# Altium PCB busanaliz2.PcbDoc (part 2 of 2)
Units mm, origin at the board's own origin, x right, y up, seen from the top; angles counter-clockwise.
Board outline 118.11 x 70.87 mm, 4 copper layers (Component Side, Ground Plane, Power Plane, Solder Side), stack 0.43 mm thick; 98 components, 84 nets, 533 pads, 170 vias.
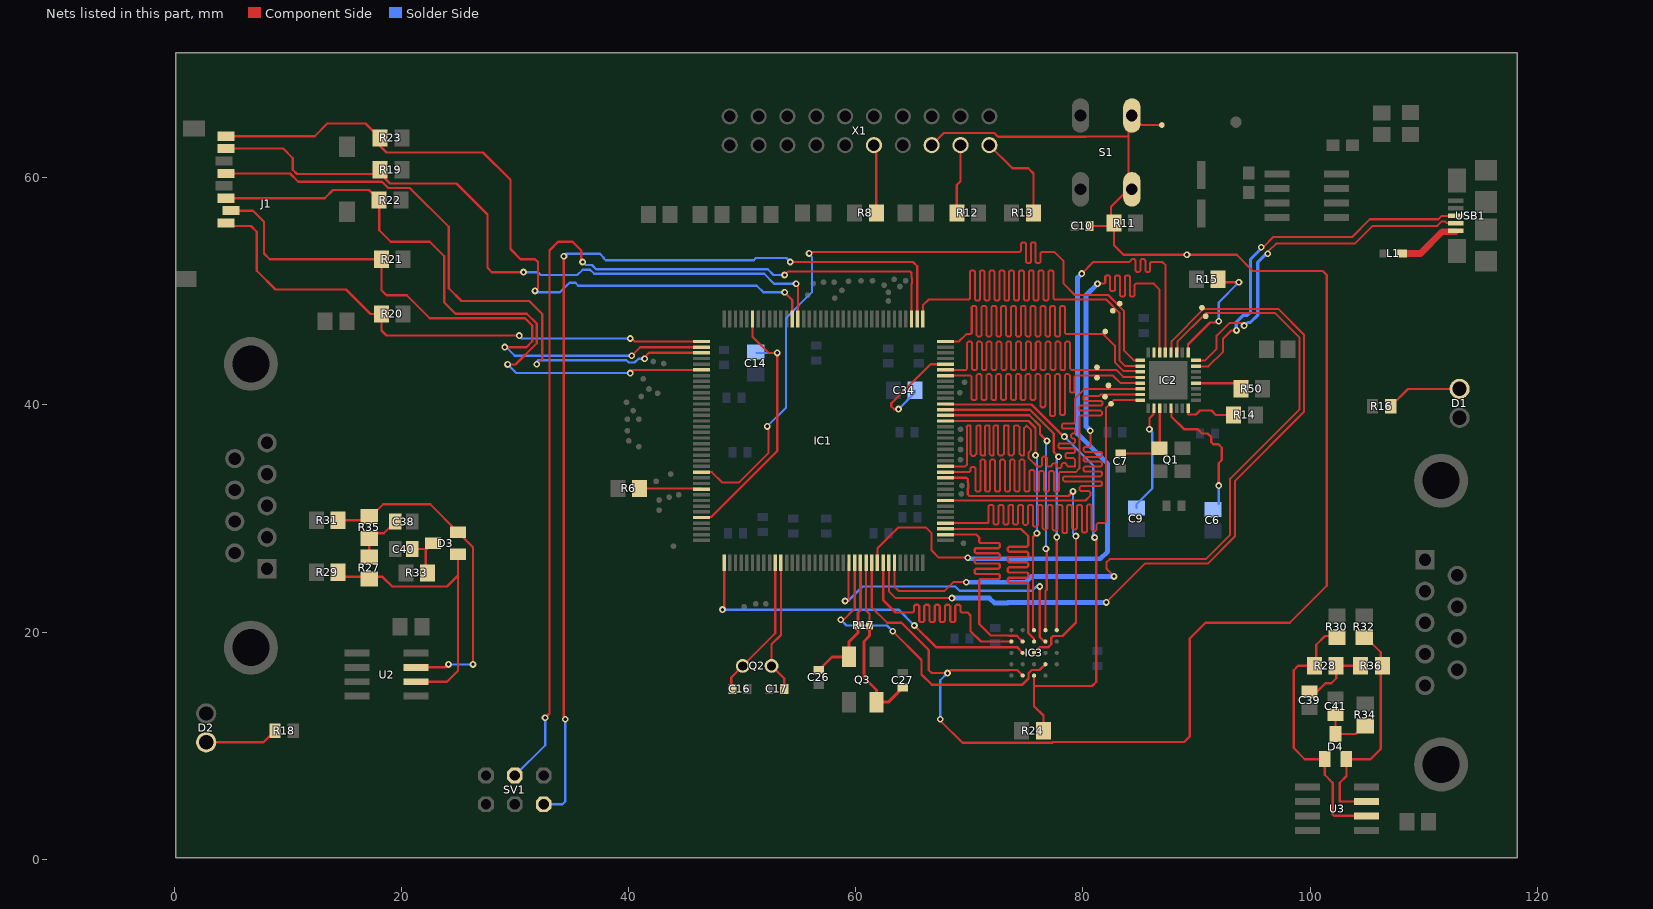
[diagram p4: the nets of this part, all layers, seen from the top]

## Via types
v1: diameter 0.6, hole 0.3, Component Side to Solder Side, 170 vias

## Nets (pads, with @x,y where several pads share a name; then routed paths per layer and width w, separated by ;. In a path a pad name is that pad's centre, name@x,y a point inside that pad or via, vN(x,y) a via of type N, cw(c..) or ccw(c..) an arc to the next point about the centre after c; other vN are vias at no path point) (continued)
NetC6_1: C6.1 IC2.29 | length 11.6
  Component Side w0.2: IC2.29@87.753,39.714 87.803,39.664 87.803,38.948 88.886,37.865 90.082,37.865 90.463,37.484 90.971,37.484 91.292,37.162 91.292,36.706 91.468,36.53 91.925,36.53 92.221,36.234 92.221,35.14 91.948,34.867 v1(91.948,32.893)
  Solder Side w0.2: C6.1@91.948,31.303 v1(91.948,32.893)
NetC7_2: C7.2 IC2.27 Q1.1 | length 7.1
  Component Side w0.2: C7.2@83.312,35.712 86.143,35.712 86.753,36.322 IC2.27@86.753,39.714
NetC9_1: C9.1 IC2.26 | length 9.6
  Component Side w0.2: v1(85.852,37.846) 85.852,38.814 86.203,39.165 IC2.26@86.203,39.664
  Solder Side w0.2: C9.1@84.709,30.922 84.709,31.242 86.106,32.639 86.106,37.592 v1(85.852,37.846)
NetC16_2: C16.2 IC1.10 Q2.2 | length 12.8
  Component Side w0.2: C16.2@49.124,14.986 49.022,15.088 49.022,16.002 Q2.2@50.038,17.018 52.9,19.88 IC1.10@52.9,26.092
NetC17_2: C17.2 IC1.11 Q2.1 | length 11.9
  Component Side w0.2: IC1.11@53.4,26.092 53.4,19.745 52.578,18.923 Q2.1@52.578,17.018 53.695,15.901 C17.2@53.695,14.986
NetC26_1: C26.1 IC1.25 Q3.P$1 R17.2 | length 11.8
  Component Side w0.254: C26.1@56.743,16.652 57.899,17.808 Q3.P$1@59.411,17.808 59.411,19.152 60.198,19.939 R17.2@60.198,20.574 60.198,21.717 60.4,21.919 IC1.25@60.4,26.092
NetC27_1: C27.1 IC1.26 Q3.P$3 R17.1 | length 15.9
  Component Side w0.2: IC1.26@60.9,26.092 60.9,21.904 61.206,21.598 R17.1@61.206,20.574
  Component Side w0.254: R17.1@61.206,20.574 61.206,19.677 60.706,19.177 60.706,16.002 61.824,14.884 Q3.P$3@61.824,13.821 62.858,13.821 C27.1@64.135,15.098
NetC34_1: C34.1 IC1.68 | length 9.4
  Component Side w0.2: v1(63.754,39.624) 63.373,39.624 63.119,39.878 63.119,40.132 66.567,43.58 IC1.68@67.888,43.58
  Solder Side w0.2: v1(63.754,39.624) 65.212,41.082 C34.1@65.212,41.275
NetC38_1: C38.1 R27.1 R35.2 | length 4.7
  Component Side w0.2: R27.1@17.145,26.454 R27.1@17.145,26.604 R35.2@17.145,28.245 17.602,28.702 18.427,28.702 C38.1@19.443,29.718
NetC39_1: C39.1 R28.1 R36.2 | length 6.2
  Component Side w0.2: C39.1@99.949,14.72 100.572,14.72 101.346,15.494 101.854,15.494 102.296,15.936 R28.1@102.296,17.018 R36.2@104.445,17.018 R36.2@104.61,17.018
NetC40_1: C40.1 D3.3 R33.2 | length 3.9
  Component Side w0.2: C40.1@20.543,27.305 22.25,27.305 22.136,27.191 R33.2@22.136,25.199
NetC41_1: C41.1 D4.3 R34.2 | length 4.7
  Component Side w0.2: C41.1@102.235,12.712 D4.3@102.235,11.024 103.988,11.024 R34.2@104.864,11.9
NetD1_1: D1.1 R16.2 | length 6.7
  Component Side w0.2: R16.2@107.099,39.878 108.623,41.402 D1.1@113.157,41.402
NetD2_1: D2.1 R18.2 | length 6.5
  Component Side w0.2: D2.1@2.794,10.287 7.836,10.287 R18.2@8.852,11.303
NetD3_1: D3.1 R27.2 R29.1 U2.6 | length 26
  Component Side w0.2: R29.1@14.262,25.273 14.262,25.235 14.643,24.854 17.145,24.854 18.326,24.854 19.177,24.003 24.003,24.003 24.976,24.976 ; U2.6@21.285,15.621 24.003,15.621 24.976,16.594 24.976,24.976 ; D3.1@24.976,26.863 24.976,24.976
NetD3_2: D3.2 R31.1 R35.1 U2.7 | length 29.6
  Component Side w0.2: R31.1@14.262,29.845 R31.1@14.412,29.845 16.98,29.845 18.377,31.242 22.512,31.242 D3.2@24.976,28.778 26.289,27.465 v1(26.289,17.145) ; U2.7@21.285,16.891 23.876,16.891 v1(24.13,17.145)
  Solder Side w0.2: v1(24.13,17.145) v1(26.289,17.145)
NetD4_1: D4.1 R28.2 R30.1 U3.6 | length 24.3
  Component Side w0.2: R28.2@100.381,17.018 98.933,17.018 98.552,16.637 98.552,9.779 99.525,8.806 D4.1@101.285,8.806 101.285,7.427 101.981,6.731 101.981,3.937 102.108,3.81 U3.6@104.978,3.81 ; R28.2@100.546,17.018 100.546,18.885 101.308,19.647 102.362,19.647 R30.1@102.362,19.558
NetD4_2: D4.2 R32.1 R36.1 U3.7 | length 20.3
  Component Side w0.2: R32.1@104.775,19.647 106.21,18.212 106.21,9.69 105.326,8.806 D4.2@103.2,8.806 103.2,7.315 102.616,6.731 102.616,5.08 U3.7@104.978,5.08
NetIC1_135: IC1.135 R6.2 | length 5.5
  Component Side w0.2: R6.2@40.97,32.639 45.541,32.639 45.55,32.63 46.362,32.63 IC1.135@46.412,32.58
NetIC2_4: IC2.4 R50.2 | length 3.4
  Component Side w0.2: IC2.4@89.953,41.914 R50.2@93.392,41.914
NetIC2_9: IC2.9 R15.2 | length 10.4
  Component Side w0.2: IC2.9@89.253,44.614 89.253,45.311 91.186,47.244 91.948,47.244 v1(91.948,47.371) ; R15.2@91.897,51.054 92.151,50.8 v1(93.726,50.8)
  Solder Side w0.2: v1(91.948,47.371) 91.948,49.022 v1(93.726,50.8)
NetIC2_32: IC2.32 R14.2 | length 4.9
  Component Side w0.2: IC2.32@89.253,39.714 89.253,39.144 89.944,39.144 90.297,39.497 91.313,39.497 91.694,39.116 R14.2@93.269,39.116
NetL1_1: L1.1 USB1.V | length 5.5
  Component Side w0.6: L1.1@108.09,53.34 109.728,53.34 111.633,55.245 USB1.V@112.821,55.245
NetR8_2: R8.2 X1.11 | length 6.1
  Component Side w0.2: X1.11@61.595,62.865 61.798,62.662 R8.2@61.798,56.896
NetR12_2: R12.2 X1.17 | length 6.1
  Component Side w0.2: R12.2@68.885,56.896 68.885,59.36 69.215,59.69 X1.17@69.215,62.865
NetR13_2: R13.2 X1.19 | length 8.4
  Component Side w0.2: X1.19@71.755,62.865 73.787,60.833 75.184,60.833 75.641,60.376 R13.2@75.641,56.896
OCTO_CLK: IC1.24 IC3.B2 | length 27.9
  Component Side w0.2: v1(58.674,21.082) 58.801,20.955 59.909,22.063 59.909,26.083 IC1.24@59.9,26.092 ; v1(63.246,20.066) 65.786,17.526 65.786,16.256 66.675,15.367 74.676,15.367 75.207,15.898 75.207,16.362 75.491,16.646 76.177,16.646 IC3.B2@76.692,17.161
  Solder Side w0.2: v1(58.674,21.082) 59.182,20.574 62.738,20.574 v1(63.246,20.066)
OCTO_DQS: IC1.48 IC3.C3 | length 29.3
  Component Side w0.2: IC1.48@67.888,33.58 69.733,33.58 69.85,33.463 69.85,33.163 69.892,33.121 69.892,32.665 69.85,32.623 69.85,32.131 70.001,31.98 78.716,31.98 v1(79.121,32.385) ; IC3.C3@75.692,18.161 76.2,18.669 76.962,18.669 77.207,18.914 77.207,19.498 77.355,19.646 78.193,19.646 79.375,20.828 v1(79.375,28.448)
  Solder Side w0.2: 79.121,28.702 v1(79.121,32.385)
OCTO_IO0: IC1.39 IC3.D3 | length 30.4
  Component Side w0.2: IC1.39@67.888,29.08 74.552,29.08 75.184,28.448 75.184,28.194 75.184,27.967 75.184,27.627 75.071,27.513 73.493,27.513 73.379,27.4 73.379,27.173 73.493,27.059 75.071,27.059 75.184,26.946 75.184,26.719 75.071,26.605 73.493,26.605 73.379,26.492 73.379,26.265 73.493,26.151 75.071,26.151 75.184,26.038 75.184,25.811 75.071,25.697 73.493,25.697 73.379,25.584 73.379,25.357 73.493,25.243 75.071,25.243 75.184,25.13 75.184,24.903 75.071,24.789 73.493,24.789 73.379,24.676 73.379,24.449 73.493,24.335 75.071,24.335 75.184,24.222 75.184,23.881 75.184,23.495 75.184,19.921 75.692,19.413 IC3.D3@75.692,19.161
OCTO_IO1: IC1.23 IC3.D2 | length 26.7
  Component Side w0.2: v1(59.055,22.733) 59.309,22.733 59.35,22.774 IC1.23@59.35,26.042 ; v1(76.2,24.003) 76.2,19.558 76.597,19.161 IC3.D2@76.692,19.161
  Solder Side w0.2: v1(59.055,22.733) 59.309,22.733 60.579,24.003 68.747,24.003 69.128,23.622 75.536,23.622 75.917,24.003 v1(76.2,24.003)
OCTO_IO2: IC1.1 IC3.C4 | length 32.1
  Component Side w0.2: v1@48.4,21.971 IC1.1@48.4,26.092 ; v1(65.151,20.574) 67.056,18.669 74.184,18.669 IC3.C4@74.692,18.161
  Solder Side w0.2: v1(48.26,21.971) 63.754,21.971 v1(65.151,20.574)
OCTO_IO3: IC1.38 IC3.D4 | length 31
  Component Side w0.2: IC1.38@67.888,28.58 70.607,28.58 70.866,28.321 70.866,28.067 70.866,27.953 70.979,27.84 72.557,27.84 72.671,27.726 72.671,27.499 72.557,27.386 70.866,27.386 70.572,27.386 70.458,27.272 70.458,27.045 70.572,26.932 70.866,26.932 72.557,26.932 72.671,26.818 72.671,26.591 72.557,26.478 70.866,26.478 70.572,26.478 70.458,26.364 70.458,26.137 70.572,26.024 70.866,26.024 72.557,26.024 72.671,25.91 72.671,25.683 72.557,25.57 70.866,25.57 70.572,25.57 70.458,25.456 70.458,25.229 70.572,25.116 70.866,25.116 72.557,25.116 72.671,25.003 72.671,24.776 72.557,24.662 70.979,24.662 70.866,24.549 70.866,24.208 70.866,24.13 70.866,20.701 71.882,19.685 73.482,19.685 73.491,19.676 74.177,19.676 IC3.D4@74.692,19.161
OCTO_IO4: IC1.29 IC3.D5 | length 29.1
  Component Side w0.2: IC1.29@62.4,26.092 62.4,22.817 63.5,21.717 64.897,21.717 65.01,21.717 65.124,21.83 65.124,22.292 65.237,22.406 65.464,22.406 65.578,22.292 65.578,21.717 65.578,20.999 65.691,20.885 65.918,20.885 66.032,20.999 66.032,21.717 66.032,22.292 66.145,22.406 66.372,22.406 66.486,22.292 66.486,21.717 66.486,20.999 66.599,20.885 66.826,20.885 66.94,20.999 66.94,21.717 66.94,22.292 67.053,22.406 67.28,22.406 67.394,22.292 67.394,21.717 67.394,20.999 67.507,20.885 67.734,20.885 67.848,20.999 67.848,21.717 67.848,22.292 67.961,22.406 68.188,22.406 68.302,22.292 68.302,21.717 68.302,20.999 68.415,20.885 68.642,20.885 68.756,20.999 68.756,21.717 68.756,22.292 68.869,22.406 69.096,22.406 69.21,22.292 69.21,21.83 69.323,21.717 69.596,21.717 69.85,21.717 70.104,21.463 70.104,20.066 71.009,19.161 IC3.D5@73.692,19.161
OCTO_IO5: IC1.58 IC3.E3 | length 26.5
  Component Side w0.2: IC1.58@67.888,38.58 75.212,38.58 75.819,37.973 v1(75.819,35.56) ; IC3.E3@75.692,20.161 75.6,20.253 75.6,28.356 v1(75.946,28.702)
  Solder Side w0.2: v1(75.819,35.56) 75.946,35.687 v1(75.946,28.702)
OCTO_IO6: IC1.59 IC3.E2 | length 27.1
  Component Side w0.2: IC1.59@67.888,39.08 75.278,39.08 76.219,38.139 76.219,37.446 v1(76.835,36.83) ; IC3.E2@76.692,20.161 76.692,23.622 76.8,23.73 76.8,27.264 v1(76.733,27.33)
  Solder Side w0.2: v1(76.733,27.33) 76.733,36.62 76.835,36.722 v1(76.835,36.83)
OCTO_IO7: IC1.60 IC3.E1 | length 28.2
  Component Side w0.2: IC1.60@67.888,39.58 75.343,39.58 77.435,37.488 77.435,35.849 v1(77.851,35.433) ; IC3.E1@77.692,20.161 v1(77.692,28.353)
  Solder Side w0.2: v1(77.692,28.353) 77.692,35.147 77.978,35.433 v1(77.851,35.433)
OCTO_NCS: IC1.61 IC3.A3 R24.1 | length 45.3
  Component Side w0.2: IC1.61@67.888,40.08 67.938,40.03 75.459,40.03 78.151,37.338 78.359,37.338 v1(78.359,37.211) ; IC3.A3@75.692,16.161 75.692,15.24 ; R24.1@76.515,11.303 76.515,12.639 75.692,13.462 75.692,15.24 ; v1(81.026,28.321) 81.172,28.175 81.172,15.621 80.791,15.24 75.692,15.24
  Solder Side w0.2: v1(78.359,37.211) 80.899,34.671 80.899,28.448 v1(81.026,28.321)
RESET: C10.1 IC1.27 IC3.A4 pad.68 R11.2 S1.3 S1.4 X1.15 | length 153.5
  Component Side w0.2: IC1.27@61.4,26.092 61.4,22.166 62.757,20.809 64.027,20.809 66.421,18.415 66.421,16.637 66.675,16.383 v1(68.072,16.383) 68.326,16.637 73.482,16.637 73.491,16.646 74.207,16.646 IC3.A4@74.692,16.161 ; X1.15@66.675,62.865 67.74,63.93 72.196,63.93 72.523,63.603 80.244,63.603 80.267,63.627 83.998,63.627 ; v1(67.437,12.319) 67.437,12.192 69.388,10.241 77.3,10.241 77.365,10.306 88.919,10.306 89.408,10.795 89.408,19.431 90.786,20.809 98.21,20.809 101.473,24.072 101.473,51.435 101.111,51.797 94.957,51.797 93.541,53.213 v1(89.154,53.213) 83.566,53.213 82.728,54.051 R11.2@82.728,56.007 ; C10.1@80.584,55.753 82.474,55.753 82.474,57.455 83.998,58.979 83.998,63.627 ; pad.68@86.944,64.643 85.141,64.643 S1.4@84.303,65.481 83.998,65.176 83.998,63.627
  Solder Side w0.2: v1(67.437,12.319) 67.437,15.748 v1(68.072,16.383)
SD_CLK: IC1.111 J1.5 | length 56.1
  Component Side w0.2: J1.5@4.552,60.382 10.173,60.382 10.91,59.644 18.276,59.644 18.819,59.101 20.728,59.101 24.149,55.68 24.149,50.273 25.273,49.149 31.242,49.149 32.385,48.006 32.385,44.069 v1(31.896,43.58) ; v1(41.402,44.069) 41.402,44.196 41.786,44.58 IC1.111@46.412,44.58
  Solder Side w0.2: v1(31.896,43.58) 31.896,43.815 32.004,43.923 39.81,43.923 40.01,43.723 40.508,43.723 40.854,44.069 v1(41.402,44.069)
SD_CMD: IC1.114 J1.3 R22.1 | length 59
  Component Side w0.2: J1.3@4.552,58.197 13.239,58.197 13.97,58.928 17.14,58.928 R22.1@18.029,58.039 18.029,55.377 19.05,54.356 22.479,54.356 23.749,53.086 23.749,49.022 24.746,48.025 31.027,48.025 31.896,47.156 31.896,45.427 30.03,43.561 v1(29.337,43.561) ; v1(40.132,42.799) 40.413,43.08 IC1.114@46.412,43.08
  Solder Side w0.2: v1(29.337,43.561) 30.099,42.799 v1(40.132,42.799)
SD_D0: IC1.95 J1.7 R19.1 | length 62.3
  Component Side w0.2: J1.7@4.552,62.566 9.57,62.566 10.414,61.722 10.414,60.706 10.795,60.325 18.161,60.325 18.985,59.501 24.827,59.501 27.559,56.769 27.559,52.07 27.94,51.689 v1(30.734,51.689) ; v1(54.737,50.673) 54.737,50.8 54.9,50.637 IC1.95@54.9,47.568
  Solder Side w0.2: v1(30.734,51.689) 32.004,51.689 32.258,51.435 35.473,51.435 35.946,51.908 36.594,51.908 36.962,51.54 51.925,51.54 52.792,50.673 v1(54.737,50.673)
SD_D1: IC1.96 J1.8 R23.1 | length 64.9
  Component Side w0.2: J1.8@4.552,63.658 12.35,63.658 13.462,64.77 16.83,64.77 R23.1@18.1,63.5 18.1,62.799 18.669,62.23 27.178,62.23 29.591,59.817 29.591,53.721 30.48,52.832 31.75,52.832 32.004,52.578 32.004,50.292 v1(31.75,50.038) ; v1(53.721,49.911) 54.4,49.232 IC1.96@54.4,47.568
  Solder Side w0.2: v1(31.75,50.038) 31.877,49.911 33.949,49.911 34.803,50.765 35.301,50.765 35.566,50.5 51.267,50.5 51.856,49.911 v1(53.721,49.911)
SD_D2: IC1.109 J1.1 R20.1 | length 49.2
  Component Side w0.2: J1.1@4.552,56.013 4.812,55.753 6.731,55.753 7.239,55.245 7.239,51.816 8.89,50.165 15.113,50.165 17.272,48.006 R20.1@18.227,48.006 18.227,46.543 18.669,46.101 v1(30.353,46.101) ; v1(40.132,45.847) 40.132,45.974 40.526,45.58 IC1.109@46.412,45.58
  Solder Side w0.2: v1(30.353,46.101) 30.607,45.847 v1(40.132,45.847)
SD_D3: IC1.110 J1.2 R21.1 | length 55.9
  Component Side w0.2: J1.2@4.959,57.105 6.903,57.105 7.874,56.134 7.874,53.34 8.382,52.832 R21.1@18.227,52.832 18.227,50.099 18.669,49.657 20.447,49.657 22.479,47.625 30.861,47.625 31.496,46.99 31.496,45.593 30.988,45.085 v1(29.083,45.085) ; v1(40.259,44.323) 41.016,45.08 IC1.110@46.412,45.08
  Solder Side w0.2: v1(29.083,45.085) 29.21,45.085 29.972,44.323 v1(40.259,44.323)
ULPI_CK: IC1.44 IC2.14 | length 70.5
  Component Side w0.177: IC1.44@67.888,31.58 80.221,31.58 80.645,32.004 80.645,32.207 ; 80.645,36.779 v1(80.645,37.719) 80.645,37.084 ; v1(81.28,50.673) 81.763,50.673 ; 85.573,50.673 86.233,50.673 86.753,50.153 IC2.14@86.753,44.614
  Component Side w0.178: 80.645,32.207 80.645,32.296 80.537,32.404 79.818,32.404 79.71,32.512 79.71,32.728 79.818,32.836 81.556,32.836 81.664,32.944 81.664,33.16 81.556,33.268 78.36,33.268 78.252,33.376 78.252,33.592 78.36,33.7 81.556,33.7 81.664,33.808 81.664,34.024 81.556,34.132 80.17,34.132 80.062,34.24 80.062,34.456 80.17,34.564 81.556,34.564 81.664,34.672 81.664,34.888 81.556,34.996 80.17,34.996 80.062,35.104 80.062,35.32 80.17,35.428 81.556,35.428 81.664,35.536 81.664,35.752 81.556,35.86 80.17,35.86 80.062,35.968 80.062,36.184 80.17,36.292 80.537,36.292 80.645,36.4 80.645,36.779 ; 81.763,50.673 81.852,50.673 81.96,50.781 81.96,51.299 82.068,51.407 82.284,51.407 82.392,51.299 82.392,50.114 82.5,50.006 82.716,50.006 82.824,50.114 82.824,51.299 82.932,51.407 83.148,51.407 83.256,51.299 83.256,49.642 83.364,49.534 83.58,49.534 83.688,49.642 83.688,51.299 83.796,51.407 84.012,51.407 84.12,51.299 84.12,49.642 84.228,49.534 84.444,49.534 84.552,49.642 84.552,50.565 84.66,50.673 85.573,50.673
  Solder Side w0.423: v1(80.645,37.719) 80.264,38.1 80.264,49.657 v1(81.28,50.673)
ULPI_D0: IC1.40 IC2.24 pad.69@82.471,40.086 | length 70.1
  Component Side w0.177: IC1.40@67.888,29.58 71.501,29.58 ; 81.783,29.58 81.904,29.58 82.042,29.718 82.042,39.751 82.705,40.414 IC2.24@85.053,40.414
  Component Side w0.178: 71.501,29.58 71.59,29.58 71.698,29.688 71.698,31.094 71.806,31.202 72.022,31.202 72.13,31.094 72.13,29.577 72.238,29.469 72.454,29.469 72.562,29.577 72.562,31.094 72.67,31.202 72.886,31.202 72.994,31.094 72.994,29.577 73.102,29.469 73.318,29.469 73.426,29.577 73.426,31.094 73.534,31.202 73.75,31.202 73.858,31.094 73.858,29.577 73.966,29.469 74.182,29.469 74.29,29.577 74.29,31.094 74.398,31.202 74.614,31.202 74.722,31.094 74.722,29.538 74.83,29.43 75.046,29.43 75.154,29.538 75.154,31.094 75.262,31.202 75.478,31.202 75.586,31.094 75.586,29.399 75.694,29.291 75.91,29.291 76.018,29.399 76.018,31.094 76.126,31.202 76.342,31.202 76.45,31.094 76.45,29.139 76.558,29.031 76.774,29.031 76.882,29.139 76.882,31.094 76.99,31.202 77.206,31.202 77.314,31.094 77.314,29.05 77.422,28.942 77.638,28.942 77.746,29.05 77.746,31.094 77.854,31.202 78.07,31.202 78.178,31.094 78.178,28.808 78.286,28.7 78.502,28.7 78.61,28.808 78.61,31.094 78.718,31.202 78.934,31.202 79.042,31.094 79.042,29.145 79.15,29.037 79.366,29.037 79.474,29.145 79.474,31.094 79.582,31.202 79.798,31.202 79.906,31.094 79.906,28.858 80.014,28.75 80.23,28.75 80.338,28.858 80.338,31.113 80.446,31.221 80.662,31.221 80.77,31.113 80.77,29.018 80.878,28.91 81.094,28.91 81.202,29.018 81.202,29.472 81.31,29.58 81.783,29.58
ULPI_D1: IC1.49 IC2.23 pad.69@81.94,40.716 | length 71.6
  Component Side w0.177: IC1.49@67.888,34.08 69.901,34.08 ; 78.765,34.08 79.35,34.08 79.684,34.414 79.684,38.436 ; 81.531,40.891 81.554,40.914 IC2.23@85.053,40.914
  Component Side w0.178: 69.901,34.08 69.99,34.08 70.098,34.188 70.098,34.426 70.206,34.534 70.422,34.534 70.53,34.426 70.53,32.477 70.638,32.369 70.854,32.369 70.962,32.477 70.962,35.074 71.07,35.182 71.286,35.182 71.394,35.074 71.394,32.477 71.502,32.369 71.718,32.369 71.826,32.477 71.826,35.074 71.934,35.182 72.15,35.182 72.258,35.074 72.258,32.477 72.366,32.369 72.582,32.369 72.69,32.477 72.69,35.074 72.798,35.182 73.014,35.182 73.122,35.074 73.122,32.477 73.23,32.369 73.446,32.369 73.554,32.477 73.554,35.074 73.662,35.182 73.878,35.182 73.986,35.074 73.986,32.477 74.094,32.369 74.31,32.369 74.418,32.477 74.418,35.074 74.526,35.182 74.742,35.182 74.85,35.074 74.85,32.477 74.958,32.369 75.174,32.369 75.282,32.477 75.282,34.177 75.39,34.285 75.606,34.285 75.714,34.177 75.714,32.477 75.822,32.369 76.038,32.369 76.146,32.477 76.146,34.083 76.254,34.191 76.47,34.191 76.578,34.083 76.578,32.477 76.686,32.369 76.902,32.369 77.01,32.477 77.01,34.083 77.118,34.191 77.334,34.191 77.442,34.083 77.442,32.477 77.55,32.369 77.766,32.369 77.874,32.477 77.874,33.972 77.982,34.08 78.765,34.08 ; 79.684,38.436 79.684,38.957 79.792,39.065 81.556,39.065 81.664,39.173 81.664,39.389 81.556,39.497 79.77,39.497 79.662,39.605 79.662,39.821 79.77,39.929 81.6,39.929 81.708,40.037 81.708,40.253 81.6,40.361 80.17,40.361 80.062,40.469 80.062,40.685 80.17,40.793 81.433,40.793 81.531,40.891
ULPI_D2: IC1.50 IC2.22 pad.69@82.245,41.707 | length 69.7
  Component Side w0.177: IC1.50@67.888,34.58 69.632,34.58 69.765,34.713 69.765,38.003 69.764,38.004 69.764,38.094 69.85,38.18 70.104,38.18 70.104,35.646 70.231,35.519 70.444,35.519 70.612,35.687 70.612,38.1 70.692,38.18 70.993,38.18 70.993,35.646 71.079,35.56 71.374,35.56 71.374,38.1 71.454,38.18 71.755,38.18 71.755,35.687 71.882,35.56 72.136,35.56 72.136,38.1 72.216,38.18 72.517,38.18 72.517,35.687 72.644,35.56 72.898,35.56 73.025,35.687 73.025,38.1 73.105,38.18 73.453,38.18 73.453,35.64 73.533,35.56 73.787,35.56 73.914,35.687 73.914,38.1 73.994,38.18 74.295,38.18 74.422,38.053 74.422,35.687 74.549,35.56 74.803,35.56 74.803,37.937 75.046,38.18 75.419,37.807 75.419,36.009 75.219,35.809 75.219,35.311 75.95,34.58 76.2,34.58 ; 79.07,34.58 79.284,34.58 79.284,35.119 ; 79.284,38.989 79.284,40.549 80.149,41.414 IC2.22@85.053,41.414
  Component Side w0.178: 76.2,34.58 76.289,34.58 76.397,34.688 76.397,35.328 76.505,35.436 76.721,35.436 76.829,35.328 76.829,34.677 76.937,34.569 77.153,34.569 77.261,34.677 77.261,34.736 77.369,34.844 77.585,34.844 77.693,34.736 77.693,34.566 77.801,34.458 78.017,34.458 78.125,34.566 78.125,34.766 78.233,34.874 78.449,34.874 78.557,34.766 78.557,34.688 78.665,34.58 79.07,34.58 ; 79.284,35.119 79.284,35.208 79.176,35.316 78.548,35.316 78.44,35.424 78.44,35.64 78.548,35.748 79.198,35.748 79.306,35.856 79.306,36.072 79.198,36.18 77.932,36.18 77.824,36.288 77.824,36.504 77.932,36.612 79.198,36.612 79.306,36.72 79.306,36.936 79.198,37.044 79.056,37.044 78.948,37.152 78.948,37.368 79.056,37.476 79.198,37.476 79.306,37.584 79.306,37.8 79.198,37.908 78.239,37.908 78.131,38.016 78.131,38.232 78.239,38.34 79.176,38.34 79.284,38.448 79.284,38.989
ULPI_D3: IC1.66 IC2.21 pad.69@81.229,42.393 | length 70
  Component Side w0.177: IC1.66@67.888,42.58 69.571,42.58 ; 79.527,42.58 82.642,42.58 83.308,41.914 IC2.21@85.053,41.914
  Component Side w0.178: 69.571,42.58 70.092,42.58 70.2,42.472 70.2,40.527 70.308,40.419 70.524,40.419 70.632,40.527 70.632,42.592 70.74,42.7 70.956,42.7 71.064,42.592 71.064,40.527 71.172,40.419 71.388,40.419 71.496,40.527 71.496,42.592 71.604,42.7 71.82,42.7 71.928,42.592 71.928,40.527 72.036,40.419 72.252,40.419 72.36,40.527 72.36,42.592 72.468,42.7 72.684,42.7 72.792,42.592 72.792,40.527 72.9,40.419 73.116,40.419 73.224,40.527 73.224,42.592 73.332,42.7 73.548,42.7 73.656,42.592 73.656,40.527 73.764,40.419 73.98,40.419 74.088,40.527 74.088,42.592 74.196,42.7 74.412,42.7 74.52,42.592 74.52,40.527 74.628,40.419 74.844,40.419 74.952,40.527 74.952,42.592 75.06,42.7 75.276,42.7 75.384,42.592 75.384,40.527 75.492,40.419 75.708,40.419 75.816,40.527 75.816,42.592 75.924,42.7 76.14,42.7 76.248,42.592 76.248,39.9 76.356,39.792 76.572,39.792 76.68,39.9 76.68,42.592 76.788,42.7 77.004,42.7 77.112,42.592 77.112,39.114 77.22,39.006 77.436,39.006 77.544,39.114 77.544,42.592 77.652,42.7 77.868,42.7 77.976,42.592 77.976,39.208 78.084,39.1 78.3,39.1 78.408,39.208 78.408,42.592 78.516,42.7 78.732,42.7 78.84,42.592 78.84,41.179 78.948,41.071 79.164,41.071 79.272,41.179 79.272,42.472 79.38,42.58 79.527,42.58
ULPI_D4: IC1.67 IC2.20 pad.69@81.229,43.307 | length 69.7
  Component Side w0.177: IC1.67@67.888,43.08 69.596,43.08 ; 79.098,43.08 82.916,43.08 83.532,42.464 IC2.20@85.003,42.464
  Component Side w0.178: 69.596,43.08 69.685,43.08 69.793,43.188 69.793,45.469 69.901,45.577 70.117,45.577 70.225,45.469 70.225,43.177 70.333,43.069 70.549,43.069 70.657,43.177 70.657,45.469 70.765,45.577 70.981,45.577 71.089,45.469 71.089,43.177 71.197,43.069 71.413,43.069 71.521,43.177 71.521,45.469 71.629,45.577 71.845,45.577 71.953,45.469 71.953,43.177 72.061,43.069 72.277,43.069 72.385,43.177 72.385,45.469 72.493,45.577 72.709,45.577 72.817,45.469 72.817,43.177 72.925,43.069 73.141,43.069 73.249,43.177 73.249,45.469 73.357,45.577 73.573,45.577 73.681,45.469 73.681,43.177 73.789,43.069 74.005,43.069 74.113,43.177 74.113,45.469 74.221,45.577 74.437,45.577 74.545,45.469 74.545,43.177 74.653,43.069 74.869,43.069 74.977,43.177 74.977,45.469 75.085,45.577 75.301,45.577 75.409,45.469 75.409,43.177 75.517,43.069 75.733,43.069 75.841,43.177 75.841,45.469 75.949,45.577 76.165,45.577 76.273,45.469 76.273,43.177 76.381,43.069 76.597,43.069 76.705,43.177 76.705,45.469 76.813,45.577 77.029,45.577 77.137,45.469 77.137,43.177 77.245,43.069 77.461,43.069 77.569,43.177 77.569,45.469 77.677,45.577 77.893,45.577 78.001,45.469 78.001,43.177 78.109,43.069 78.325,43.069 78.433,43.177 78.433,45.469 78.541,45.577 78.757,45.577 78.865,45.469 78.865,43.188 78.973,43.08 79.098,43.08
ULPI_D5: IC1.72 IC2.19 pad.69@81.966,46.457 | length 70.2
  Component Side w0.177: IC1.72@67.888,45.58 69.075,45.58 69.723,46.228 70.007,46.228 ; 78.701,46.228 81.788,46.228 82.801,45.215 82.801,43.76 83.597,42.964 85.003,42.964 IC2.19@85.053,42.914
  Component Side w0.178: 70.007,46.228 70.096,46.228 70.204,46.336 70.204,48.599 70.312,48.707 70.528,48.707 70.636,48.599 70.636,46.144 70.744,46.036 70.96,46.036 71.068,46.144 71.068,48.599 71.176,48.707 71.392,48.707 71.5,48.599 71.5,46.144 71.608,46.036 71.824,46.036 71.932,46.144 71.932,48.599 72.04,48.707 72.256,48.707 72.364,48.599 72.364,46.144 72.472,46.036 72.688,46.036 72.796,46.144 72.796,48.599 72.904,48.707 73.12,48.707 73.228,48.599 73.228,46.144 73.336,46.036 73.552,46.036 73.66,46.144 73.66,48.599 73.768,48.707 73.984,48.707 74.092,48.599 74.092,46.144 74.2,46.036 74.416,46.036 74.524,46.144 74.524,48.599 74.632,48.707 74.848,48.707 74.956,48.599 74.956,46.144 75.064,46.036 75.28,46.036 75.388,46.144 75.388,48.599 75.496,48.707 75.712,48.707 75.82,48.599 75.82,46.142 75.928,46.034 76.144,46.034 76.252,46.142 76.252,48.599 76.36,48.707 76.576,48.707 76.684,48.599 76.684,46.135 76.792,46.027 77.008,46.027 77.116,46.135 77.116,48.599 77.224,48.707 77.44,48.707 77.548,48.599 77.548,46.125 77.656,46.017 77.872,46.017 77.98,46.125 77.98,48.599 78.088,48.707 78.304,48.707 78.412,48.599 78.412,46.336 78.52,46.228 78.701,46.228
ULPI_D6: IC1.73 IC2.18 pad.69@82.626,48.285 | length 70.8
  Component Side w0.177: IC1.73@65.9,47.568 65.9,48.755 66.421,49.276 69.85,49.276 ; 78.08,49.276 79.248,49.276 82.042,49.276 83.201,48.117 83.201,43.926 83.713,43.414 IC2.18@85.053,43.414
  Component Side w0.178: 69.85,49.276 69.939,49.276 70.047,49.384 70.047,51.735 70.155,51.843 70.371,51.843 70.479,51.735 70.479,49.292 70.587,49.184 70.803,49.184 70.911,49.292 70.911,51.735 71.019,51.843 71.235,51.843 71.343,51.735 71.343,49.292 71.451,49.184 71.667,49.184 71.775,49.292 71.775,51.735 71.883,51.843 72.099,51.843 72.207,51.735 72.207,49.292 72.315,49.184 72.531,49.184 72.639,49.292 72.639,51.735 72.747,51.843 72.963,51.843 73.071,51.735 73.071,49.292 73.179,49.184 73.395,49.184 73.503,49.292 73.503,51.735 73.611,51.843 73.827,51.843 73.935,51.735 73.935,49.292 74.043,49.184 74.259,49.184 74.367,49.292 74.367,51.735 74.475,51.843 74.691,51.843 74.799,51.735 74.799,49.292 74.907,49.184 75.123,49.184 75.231,49.292 75.231,51.735 75.339,51.843 75.555,51.843 75.663,51.735 75.663,49.292 75.771,49.184 75.987,49.184 76.095,49.292 76.095,51.735 76.203,51.843 76.419,51.843 76.527,51.735 76.527,49.292 76.635,49.184 76.851,49.184 76.959,49.292 76.959,51.735 77.067,51.843 77.283,51.843 77.391,51.735 77.391,49.384 77.499,49.276 78.08,49.276
ULPI_D7: IC1.132 IC2.17 pad.69@83.236,48.92 | length 69.7
  Component Side w0.177: IC1.132@46.412,34.08 47.327,34.08 48.26,33.147 49.687,33.147 52.324,35.784 52.324,38.1 v1(52.197,38.1) ; v1@56.007,53.467 74.342,53.467 ; 76.502,53.467 77.47,53.467 78.294,52.643 78.294,50.673 79.291,49.676 82.208,49.676 83.601,48.283 83.601,44.796 84.483,43.914 IC2.17@85.053,43.914
  Component Side w0.178: 74.342,53.467 74.431,53.467 74.539,53.575 74.539,54.2 74.647,54.308 74.863,54.308 74.971,54.2 74.971,52.584 75.079,52.476 75.295,52.476 75.403,52.584 75.403,54.2 75.511,54.308 75.727,54.308 75.835,54.2 75.835,52.584 75.943,52.476 76.159,52.476 76.267,52.584 76.267,53.359 76.375,53.467 76.502,53.467
  Solder Side w0.177: v1(52.197,38.1) 53.848,39.751 53.848,47.625 56.134,49.911 56.134,53.037 55.88,53.291 v1(55.88,53.34)
ULPI_DIR: IC1.30 IC2.12 pad.69@90.475,48.565 | length 71
  Component Side w0.177: IC1.30@62.9,26.092 62.9,23.587 63.5,22.987 v1(68.453,22.987) ; v1(82.042,22.606) 85.452,26.016 90.971,26.016 93.364,28.409 93.364,33.293 99.463,39.392 99.463,46.19 97.19,48.463 90.653,48.463 87.803,45.614 87.803,44.614 IC2.12@87.753,44.614
  Solder Side w0.177: 73.352,22.56 73.398,22.606
  Solder Side w0.423: v1(68.453,22.987) 71.763,22.987 72.19,22.56 73.352,22.56 ; 73.398,22.606 v1(82.042,22.606)
ULPI_NXT: IC1.31 IC2.11 pad.69@90.805,47.803 | length 69.1
  Component Side w0.177: IC1.31@63.4,26.092 63.4,23.976 63.754,23.622 67.818,23.622 68.58,24.384 v1(69.723,24.384) ; v1(82.728,24.892) 82.067,25.552 82.067,26.137 82.347,26.416 90.805,26.416 92.964,28.575 92.964,33.503 99.085,39.624 99.085,45.914 96.914,48.085 90.833,48.085 88.303,45.555 88.303,44.664 IC2.11@88.253,44.614
  Solder Side w0.423: v1(69.723,24.384) 74.97,24.384 75.478,24.892 v1(82.728,24.892)
ULPI_STP: IC1.28 IC2.13 | length 69.7
  Component Side w0.177: IC1.28@61.9,26.092 61.9,27.356 63.754,29.21 66.167,29.21 66.675,28.702 66.675,27.178 67.31,26.543 v1(69.85,26.543) ; v1(79.883,51.562) 80.899,52.578 83.993,52.578 ; 86.208,52.578 86.995,52.578 87.249,52.324 IC2.13@87.249,44.618 ; IC2.13@87.253,44.614 IC2.13@87.303,44.614
  Component Side w0.178: 83.993,52.578 84.082,52.578 84.19,52.686 84.19,52.716 84.298,52.824 84.514,52.824 84.622,52.716 84.622,51.829 84.73,51.721 84.946,51.721 85.054,51.829 85.054,52.716 85.162,52.824 85.378,52.824 85.486,52.716 85.486,51.829 85.594,51.721 85.81,51.721 85.918,51.829 85.918,52.47 86.026,52.578 86.208,52.578
  Solder Side w0.177: v1(69.85,26.543) v1@69.942,26.451
  Solder Side w0.423: v1@69.942,26.451 81.534,26.451 82.169,27.086 82.169,34.798 79.527,37.44 79.527,51.206 v1(79.883,51.562)
USART_RX: IC1.75 SV1.3 | length 85.9
  Component Side w0.2: v1(32.639,12.446) 33.02,12.827 33.02,53.594 33.782,54.356 35.052,54.356 35.814,53.594 35.814,52.451 v1(35.941,52.578) ; v1(53.721,51.435) 53.733,51.435 54.038,51.74 64.783,51.74 64.9,51.623 64.9,51.194 64.939,51.155 64.939,50.699 64.9,50.66 IC1.75@64.9,47.568
  Solder Side w0.2: SV1.3@29.972,7.366 32.639,10.033 v1(32.639,12.446) ; v1(35.941,52.578) 36.211,52.308 36.759,52.308 37.127,51.94 52.24,51.94 52.745,51.435 v1(53.721,51.435)
USART_TX: IC1.74 SV1.2 | length 86.9
  Component Side w0.2: v1(34.29,53.086) 34.29,12.573 34.544,12.319 v1(34.417,12.319) ; v1(54.229,52.578) 65.024,52.578 65.4,52.202 IC1.74@65.4,47.568
  Solder Side w0.2: SV1.2@32.512,4.826 34.163,4.826 34.417,5.08 v1(34.417,12.319) ; v1(34.29,53.086) 34.509,53.305 37.46,53.305 37.811,52.954 37.811,52.907 37.978,52.74 51.014,52.74 51.198,52.924 53.883,52.924 v1(54.229,52.578) v1@54.062,52.578
USB_OTG_HS_DM: IC2.8 USB1.D- | length 31.7
  Component Side w0.177: IC2.8@89.953,43.914 90.748,43.914 91.77,44.936 91.77,46.087 92.907,47.224 93.879,47.224 ; v1@96.266,53.385 96.396,53.515 96.396,53.6 96.999,54.204 103.944,54.204 105.506,55.765 111.207,55.765 111.604,56.163 111.886,56.163 112.047,56.002 USB1.D-@112.821,56.002
  Component Side w0.178: 93.879,47.224 v1@94.12,46.983
  Component Side w0.34: v1@94.12,46.983 v1(94.19,46.983) ; v1(96.266,53.315) v1@96.266,53.385
  Solder Side w0.279: v1@94.249,46.983 94.52,47.254 94.737,47.254 95.382,47.899 95.382,52.547 96.04,53.205 96.097,53.205 v1@96.207,53.315
  Solder Side w0.381: v1(94.19,46.983) v1@94.249,46.983 ; v1@96.207,53.315 v1(96.266,53.315)
USB_OTG_HS_DP: IC2.7 USB1.D+ | length 32.1
  Component Side w0.177: IC2.7@89.993,43.374 90.972,43.374 ; 90.981,43.384 91.038,43.384 92.35,44.696 92.35,45.847 93.053,46.55 v1@93.511,46.55 ; v1@95.905,53.929 96.759,54.783 103.704,54.783 105.266,56.345 111.285,56.345 111.582,56.642 USB1.D+@112.821,56.642
  Component Side w0.178: IC2.7@89.953,43.414 IC2.7@89.993,43.374 ; 90.972,43.374 90.981,43.384
  Component Side w0.34: v1@93.511,46.55 v1(93.515,46.554)
  Solder Side w0.279: v1@93.5,46.569 93.5,47.269 94.119,47.889 94.474,47.889 94.747,48.162 94.747,52.81 95.591,53.654 95.591,53.712 v1@95.7,53.821
  Solder Side w0.381: v1@93.5,46.569 v1(93.515,46.554) ; v1@95.7,53.821 v1(95.7,53.88)
VCAP2: C14.1 IC1.103 IC1.140 | length 23.9
  Component Side w0.2: IC1.140@46.412,30.08 46.462,30.13 47.274,30.13 53.086,35.942 v1(53.086,44.577) 52.324,44.577 50.9,46.001 IC1.103@50.9,47.568
  Solder Side w0.2: C14.1@51.242,44.577 v1(53.086,44.577)
VDD18_1: IC2.15
pads on no net: IC1.4 IC1.5 IC1.9 IC1.37 IC1.43 IC1.45 IC1.46 IC1.47 IC1.51 IC1.52 IC1.53 IC1.54 IC1.57 IC1.62 IC1.63 IC1.64 IC1.65 IC1.76 IC1.77 IC1.78 IC1.81 IC1.82 IC1.83 IC1.84 IC1.85 IC1.86 IC1.87 IC1.88 IC1.90 IC1.91 IC1.93 IC1.94 IC1.97 IC1.98 IC1.112 IC1.113 IC1.115 IC1.116 IC1.117 IC1.120 IC1.121 IC1.122 IC1.123 IC1.124 IC1.125 IC1.126 IC1.127 IC1.133 IC1.134 IC1.136 IC1.137 IC1.138 IC1.139 IC1.142 IC2.3 IC2.5 IC2.10 IC3.A2 IC3.A5 IC3.B5 IC3.C2 IC3.C5 J2.1 J2.4 J2.5 J2.6 J2.8 J2.9 J2.10 J2.11 J3.1 J3.4 J3.5 J3.6 J3.8 J3.9 J3.10 J3.11 U1.4 USB1.ID
copper on no net: | length 167.1
  Component Side w0.2: 39.802,40.221 39.878,40.259 40.386,40.259 40.598,40.047 40.614,40.047 40.637,40.024 40.875,40.024 41.187,40.024 41.631,39.58 46.412,39.58 ; 39.878,37.719 40.017,37.58 46.412,37.58 ; 39.878,38.735 40.533,38.08 46.412,38.08 ; 40.005,36.83 40.255,37.08 46.412,37.08 ; 40.386,39.497 40.513,39.624 41.021,39.624 41.565,39.08 46.412,39.08 ; 40.894,36.322 41.152,36.58 46.412,36.58 ; 40.894,38.735 41.049,38.58 46.412,38.58 ; 41.097,40.742 41.962,40.08 46.412,40.08 ; 41.275,42.291 41.564,42.58 46.412,42.58 ; 41.783,41.402 42.461,42.08 46.412,42.08 ; 42.164,43.815 42.429,44.08 46.412,44.08 ; 42.418,33.274 42.612,33.08 46.412,33.08 ; 42.545,41.021 43.104,41.58 46.412,41.58 ; 42.672,30.734 42.826,30.58 46.412,30.58 ; 42.672,31.623 43.215,31.08 46.412,31.08 ; 43.078,43.637 46.412,43.58 ; 43.561,31.877 43.858,31.58 46.412,31.58 ; 43.688,33.909 44.017,33.58 46.412,33.58 ; 43.942,27.559 43.942,27.813 45.209,29.08 46.412,29.08 ; 44.399,32.08 46.412,32.08 ; 49.9,26.092 49.9,22.49 50.165,22.225 ; 50.4,26.092 50.4,23.26 51.181,22.479 ; 52.07,22.479 52.4,22.709 52.4,26.092 ; 55.4,47.568 55.4,49.304 55.753,49.657 ; 55.9,47.568 55.9,48.661 56.388,49.149 56.388,50.546 56.261,50.673 ; 56.9,47.568 56.9,50.55 57.15,50.8 ; 57.4,47.568 57.4,49.78 58.09,50.8 ; 58.141,49.403 58.4,49.296 58.4,47.568 ; 58.774,50.077 58.9,50.066 58.9,47.568 ; 59.309,50.927 59.4,50.836 59.4,47.568 ; 59.9,47.568 59.9,50.375 60.452,50.927 ; 60.4,47.568 60.4,49.859 61.468,50.927 ; 60.9,47.568 60.9,49.47 61.976,50.546 62.103,50.546 62.484,50.546 ; 61.4,47.568 61.4,49.081 62.103,49.784 62.865,49.911 ; 61.9,47.568 61.9,48.946 62.103,49.149 62.865,49.149 ; 63.119,50.927 62.984,50.792 62.984,50.538 63.4,50.122 63.4,47.568 ; 63.9,47.568 63.9,49.892 63.9,50.4 ; 64.389,50.927 64.4,47.568 ; 67.888,28.08 69.202,28.08 69.469,27.813 ; 67.888,32.08 69.291,32.156 ; 67.888,33.08 69.155,33.08 69.342,32.893 ; 67.888,35.58 69.068,35.58 69.215,35.179 ; 67.888,36.08 69.215,36.068 ; 67.888,36.58 68.957,36.58 69.215,36.957 ; 67.888,38.08 68.981,38.08 69.215,37.846 ; 67.888,41.08 69.156,41.08 ; 67.888,42.08 69.571,41.986

## Polygon pours and split planes (outlines as drawn)
DGND on Ground Plane (split plane): 117.727,0.637 0.637,0.637 0.637,70.483 117.727,70.483
+3V3 on Power Plane (split plane): 117.727,0.637 0.637,0.637 0.637,70.483 117.727,70.483

## Keep-outs
Keep-Out Layer:
  the board outline again, w1.2

## Silkscreen, mask and mechanical layers (free items; w line width, h text height)
Top Overlay:
  circle w0.254: c34.29,64.516 r3.939
  text "BoTi" at 30.988,63.373 h2

## Text inside footprints (layer, text, board x,y; h text height)
J2: Top Overlay "6" at 2.208,26.46 h1.5 r90; Top Overlay "9" at 2.208,34.77 h1.5 r90; Top Overlay "5" at 11.608,36.155 h1.5 r90; Top Overlay "1" at 11.608,25.325 h1.5 r90
J3: Top Overlay "6" at 116.056,25.483 h1.5 r270; Top Overlay "9" at 116.056,17.173 h1.5 r270; Top Overlay "5" at 106.656,15.788 h1.5 r270; Top Overlay "1" at 106.656,26.618 h1.5 r270
S1: Mechanical 16 "4" at 84.836,65.786 h1.97 r90; Mechanical 16 "3" at 84.836,57.658 h1.97 r90; Mechanical 16 "2" at 80.518,65.786 h1.97 r90; Mechanical 16 "1" at 80.391,57.912 h1.97 r90
SV1: Top Overlay "1" at 35.052,8.001 h1.97 r180; Top Overlay "2" at 35.052,5.461 h1.97 r180; Top Overlay "6" at 30.353,10.16 h1.97 r180
USB1: Top Overlay "GND" at 112.014,58.039 h0.39 r180; Top Overlay "ID" at 112.014,57.404 h0.39 r180; Top Overlay "D+" at 112.014,56.769 h0.39 r180; Top Overlay "D-" at 112.014,56.134 h0.39 r180; Top Overlay "V" at 112.014,55.372 h0.39 r180